# EAGLE board main (EAGLE 9.2.2)
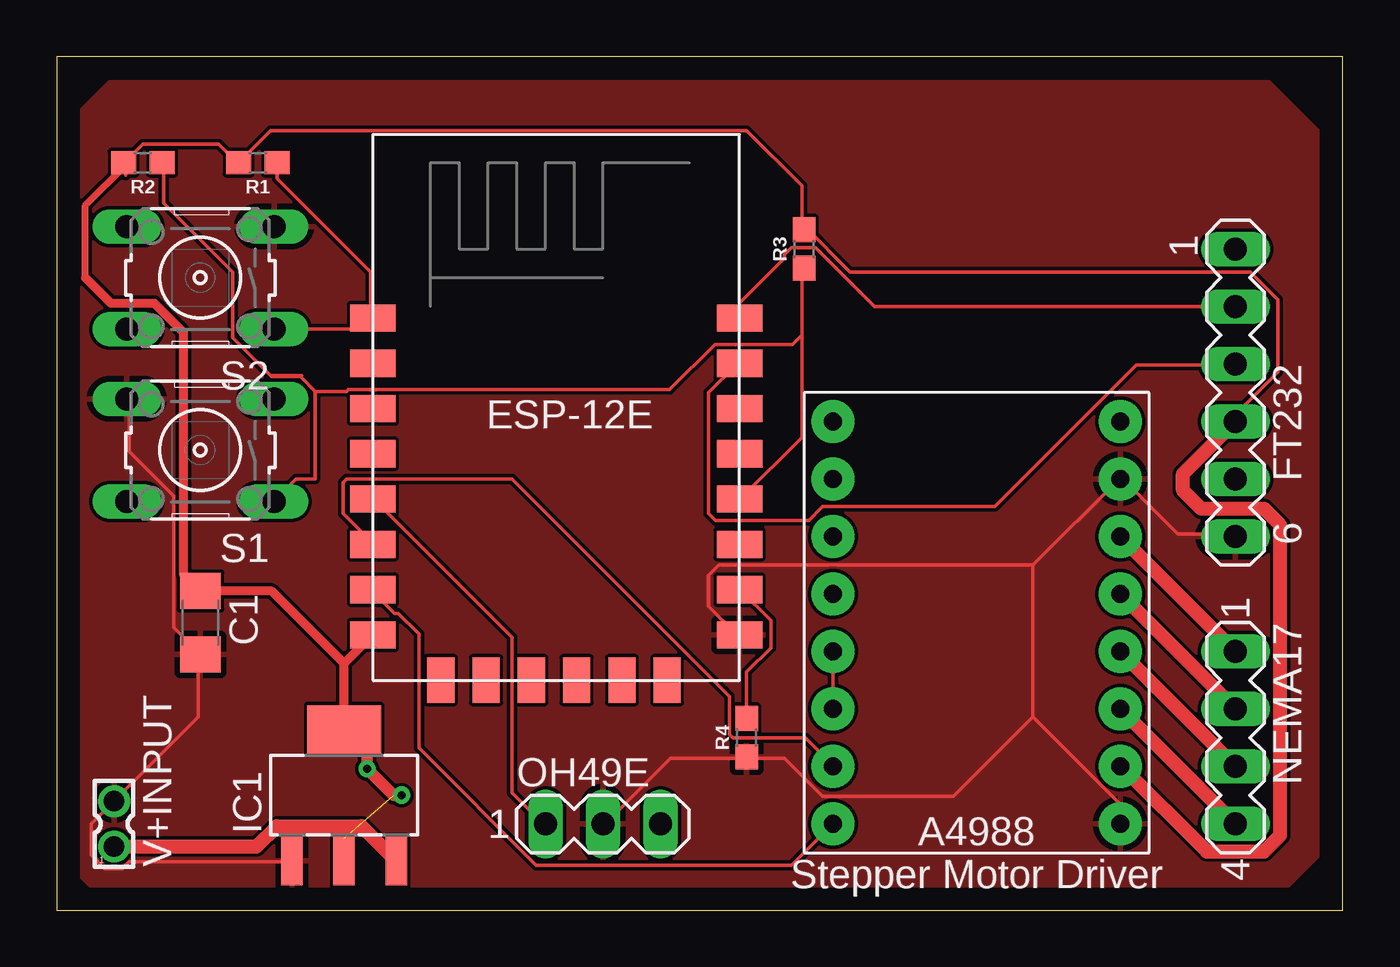
[diagram p0: board, top side]
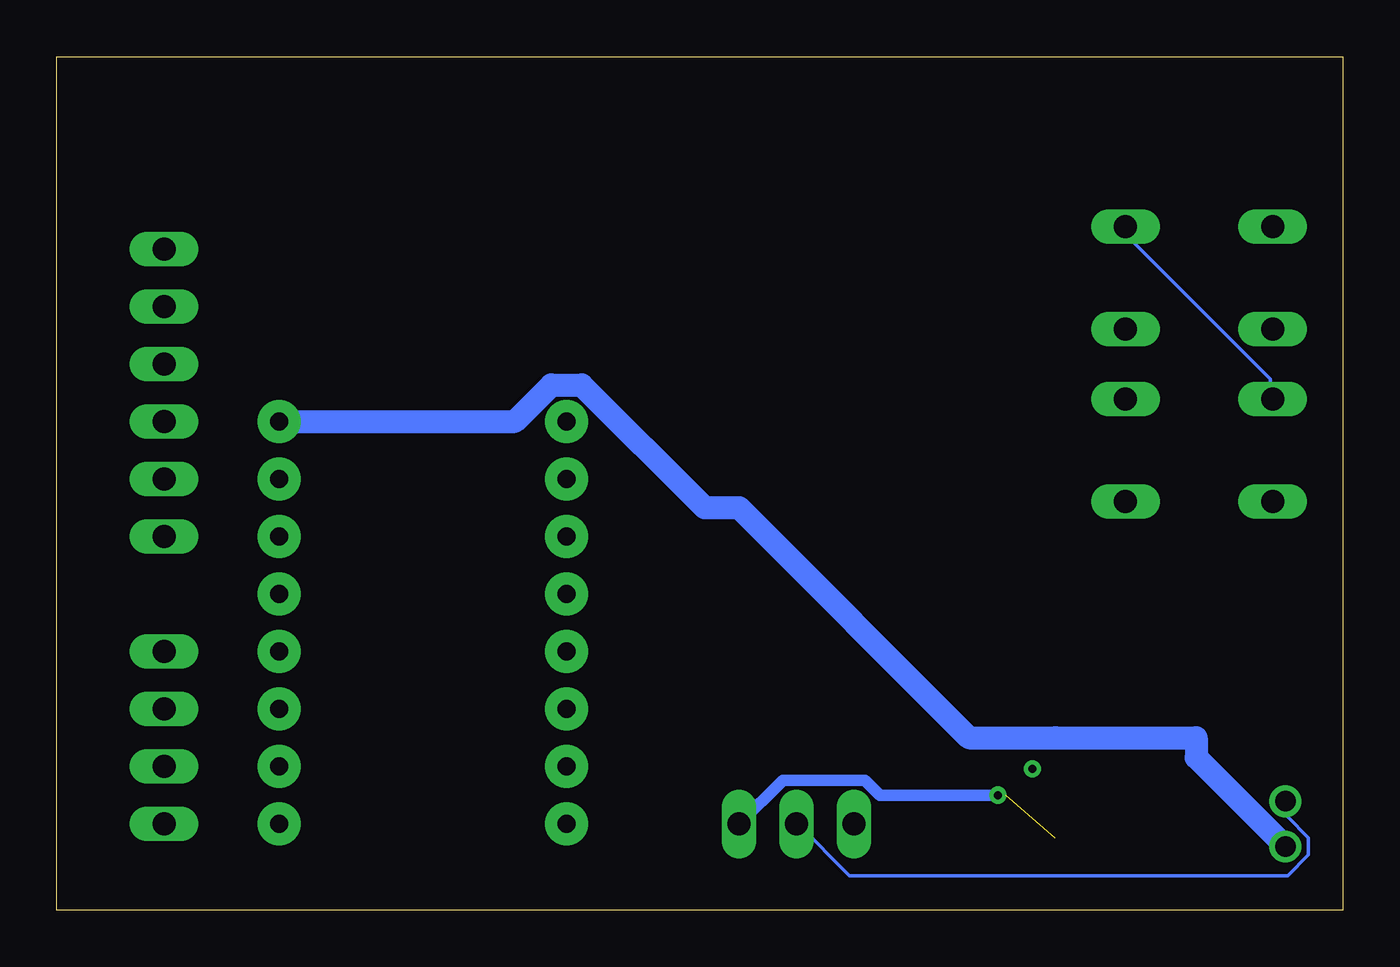
[diagram p1: board, bottom side, seen from below]

Size 56.82 x 37.71 mm. Coordinates in mm from the lower left corner, seen from the top.
Outline: 0,0 56.82,0 56.82,37.71 0,37.71 0,0
Copper layers (1*16): Top 0.035mm / dielectric 1.5mm / Bottom 0.035mm
Design rules "default": minimum track width 6mil, minimum drill 0.35mm, track to track 6mil, track to pad 6mil, pad to pad 6mil, via to via 6mil, smd to smd 6mil, copper to edge 40mil, drill to drill 6mil, minimum pad ring 10mil, minimum via ring 8mil, stop-mask expansion 4mil, vias tented up to drill 0mil, thermal gap 10mil

## Footprints (pad centres in the part's own frame; a part is rotated, then mirrored left to right if it is on the bottom)
C1206 = smd 1.6 x 1.8: 1 -1.4,0; 2 1.4,0
MA06-1 = drill 1.016 long: 1 -6.35,0; 2 -3.81,0; 3 -1.27,0; 4 1.27,0; 5 3.81,0; 6 6.35,0
SOT223 = smd 0.95 x 2.15: 1 -2.3,-2.9; 2 0,-2.9; 3 2.3,-2.9 | smd 3.25 x 2.15: 4 0,2.9
MA04-1 = drill 1.016 long: 1 -3.81,0; 2 -1.27,0; 3 1.27,0; 4 3.81,0
MA03-1 = drill 1.016 long: 1 -2.54,0; 2 0,0; 3 2.54,0
0603 = smd 1.1 x 1: 1 -0.85,0; 2 0.85,0
B3F-10XX = drill 1.016 long: 1 -3.251,2.261; 2 3.251,2.261; 3 -3.251,-2.261; 4 3.251,-2.261
ESP8266-ESP12E = smd 2 x 1.2: 1 -7.62,5.84; 2 -7.62,3.84; 3 -7.62,1.84; 4 -7.62,-0.16; 5 -7.62,-2.16; 6 -7.62,-4.16; 7 -7.62,-6.16; 8 -7.62,-8.16; 9 8.58,-8.16; 10 8.58,-6.16; 11 8.58,-4.16; 12 8.58,-2.16; 13 8.58,-0.16; 14 8.58,1.84; 15 8.58,3.84; 16 8.58,5.84 | smd 1.2 x 2: 17 -4.62,-10.16; 18 -2.62,-10.16; 19 -0.62,-10.16; 20 1.38,-10.16; 21 3.38,-10.16; 22 5.38,-10.16
A4988_STEP = drill 0.8 pad 1.905: 1A 6.35,-1.27; 1B 6.35,-3.81; 2A 6.35,1.27; 2B 6.35,3.81; /EN -6.35,8.89; /RST -6.35,-1.27; /SLP -6.35,-3.81; DIR -6.35,-8.89; GND 6.35,6.35; GND2 6.35,-8.89; MS1 -6.35,6.35; MS2 -6.35,3.81; MS3 -6.35,1.27; STEP -6.35,-6.35; VDD 6.35,-6.35; VMOT 6.35,8.89
332-02 = drill 0.9 pad 1.27: 1 0,-1; 2 0,1

## Placement (x,y rotation side)
C1  10uF  [C1206]  6.35,12.7 270 top
FT232  [MA06-1]  52.07,22.86 270 top
IC1  LM1117MP-3.3  [SOT223]  12.7,5.08 0 top
NEMA17  [MA04-1]  52.07,7.62 270 top
OH49E  [MA03-1]  24.13,3.81 0 top
R1  10k  [0603]  8.89,33.02 180 top
R2  10k  [0603]  3.81,33.02 180 top
R3  10k  [0603]  33.02,29.21 90 top
R4  10k  [0603]  30.48,7.62 90 top
S1  [B3F-10XX]  6.35,20.32 180 top
S2  [B3F-10XX]  6.35,27.94 180 top
SJR1  [ESP8266-ESP12E]  21.59,20.32 0 top
U$1  A4988_STEP  [A4988_STEP]  40.64,12.7 0 top
V+INPUT  332-02  [332-02]  2.54,3.81 0 top

## Library data of the parts
C1 = eagle-ltspice; SPICEMODEL: NONE; SPICEPREFIX: C
FT232 NEMA17 OH49E = con-lstb; OC_FARNELL: unknown; OC_NEWARK: unknown
IC1 = lm1117_10; MF: Texas Instruments; MPN: LM1117MP-3.3; OC_FARNELL: 9778195; OC_NEWARK: 28X3416
R1-R4 = SparkFun-Resistors; PROD_ID: RES-00824
S1 S2 = switch-omron; MPN: B3F-1000; OC_FARNELL: 176432; OC_NEWARK: 36M3542
SJR1 = esp12e
U$1 = IC
V+INPUT = con-garry

## Nets
+3V: C1.1 FT232.4 IC1.2 IC1.4 OH49E.3 R1.2 R2.2 R3.2 SJR1.8 U$1.VDD
+12V: IC1.3 U$1.VMOT V+INPUT.1
GND: C1.2 FT232.6 IC1.1 OH49E.2 R4.1 S1.4 S2.3 SJR1.9 U$1.GND U$1.GND2 V+INPUT.2
GPIO0: R2.1 R3.1 S1.1 SJR1.12
GPIO12: SJR1.6 U$1.STEP
GPIO13: SJR1.7 U$1.DIR
GPIO14: OH49E.1 SJR1.5
N$1: R1.1 S2.1 SJR1.1
N$3: R4.2 SJR1.10
N$4: NEMA17.4 U$1.1B
N$5: NEMA17.3 U$1.1A
N$6: NEMA17.2 U$1.2A
N$7: NEMA17.1 U$1.2B
N$8: U$1./RST U$1./SLP
RX: FT232.3 SJR1.15
TX: FT232.2 SJR1.16

## Tracks (layer width: path | path; a pad name or v marks a point on that pad's centre or on a via)
+3V  (via drill 0.35)  (1 unrouted)
  Top 0.152: 12.7,3.18 IC1.2 12.8,2.13 | FT232.4 52.12,21.64 52.12,21.95 53.95,23.77 53.95,26.98 52.73,28.19 35.05,28.19 33.07,30.18 R3.2 32.92,30.18 32.92,32 30.48,34.44 9.45,34.44 8.08,33.07 R1.2 7.92,33.07 7.16,33.83 3.81,33.83 3.05,33.07 R2.2 3.05,32.92 3.05,32.46 | 6.25,14.17 C1.1 | 13.72,7.01 v13.72,6.25
  Top 0.305: 1.27,27.94 1.27,31.14 3.05,32.92
  Top 0.406: 12.7,10.89 SJR1.8 | IC1.4 12.7,10.89 | 12.7,10.89 9.49,14.1 C1.1 5.61,14.84 5.61,25.51 4.32,26.8 2.41,26.8 1.27,27.94
  Top 0.508: IC1.4 13.72,6.96 v13.72,6.25 14.88,5.08 v15.24,5.08
  Top 0.61: FT232.4 49.75,19.27 49.75,18.55 50.57,17.73 53.34,17.73 54.05,17.02 54.05,3.31 53.34,2.59 50.8,2.59 47.04,6.35 U$1.VDD
  Bottom 0.508: v15.24,5.08 20.45,5.08 21.11,5.74 24.74,5.74 OH49E.3
+12V
  Top 0.61: V+INPUT.1 8.83,2.81 9.74,3.71 13.47,3.71 IC1.3
  Bottom 0.152: 2.59,2.9 V+INPUT.1
  Bottom 1.016: U$1.VMOT 36.57,21.59 34.96,23.2 33.62,23.2 28.2,17.78 26.67,17.78 16.51,7.62 12.7,7.62 6.48,7.62 6.48,6.75 V+INPUT.1
GND
  Top 0.152: IC1.1 10.36,2.13 3.2,2.13 2.9,1.83 2.13,1.83 1.52,2.44 1.52,3.81 2.44,4.72 V+INPUT.2 2.59,4.88 6.25,8.53 6.25,11.28 C1.2 6.25,11.43 5.18,12.5 5.18,18.29 3.2,20.27 3.2,22.55 S1.4 | 30.48,6.71 27.13,6.71 24.23,3.81 OH49E.2 | 43.13,15.24 29.26,15.24 28.8,14.78 28.8,13.41 30.02,12.19 SJR1.9 | 43.13,15.24 46.94,19.05 U$1.GND 47.09,19.05 49.53,16.61 51.97,16.61 FT232.6 | 43.13,8.53 46.94,4.72 46.94,3.81 U$1.GND2 | 43.13,15.24 43.13,8.53 | 30.48,6.71 32.16,6.71 33.83,5.03 39.62,5.03 43.13,8.53 | 30.48,6.71 R4.1
  Bottom 0.152: S2.3 9.6,29.87 3.2,23.47 3.2,22.71 S1.4 | V+INPUT.2 2.44,4.72 2.44,4.12 1.52,3.2 1.52,2.44 2.44,1.52 21.79,1.52 24.08,3.81 OH49E.2
  pour Top: 0,2.54 0,34.29 2.54,36.83 53.34,36.83 55.88,34.29 55.88,2.54 53.34,0 2.54,0
GPIO0
  Top 0.152: 32.92,25.4 32.92,20.88 30.18,18.14 SJR1.12 | 32.92,25.4 32.92,28.35 R3.1 | 9.45,23.62 7.77,25.3 7.77,28.19 4.72,31.24 4.72,32.92 R2.1 | 10.82,23.62 9.45,23.62 | 9.45,23.62 9.5,23.57 10.77,23.57 11.43,22.91 | 11.43,22.91 11.43,19.05 10.59,19.05 S1.1 | 11.43,22.91 12.8,22.91 12.88,22.99 27.07,22.99 29.07,24.99 32.51,24.99 32.92,25.4
GPIO12
  Top 0.152: SJR1.6 13.87,16.31 12.65,17.53 12.65,18.9 12.8,19.05 20.12,19.05 29.72,9.45 29.72,7.77 29.87,7.62 33.07,7.62 34.29,6.4 U$1.STEP
GPIO13
  Top 0.152: U$1.DIR 32.46,1.98 21.18,1.98 16,7.16 16,12.19 15.09,13.11 14.94,13.11 14.02,14.02 SJR1.7
GPIO14
  Top 0.152: SJR1.5 14.02,18.14 20.12,12.04 20.12,5.18 21.49,3.81 OH49E.1
N$1
  Top 0.152: S2.1 13.49,25.68 SJR1.1 13.87,26.21 13.87,28.19 9.75,32.31 9.75,32.92 R1.1
N$3
  Top 0.152: R4.2 30.48,10.52 31.55,11.58 31.55,12.8 30.18,14.17 SJR1.10
N$4
  Top 0.152: 51.97,3.81 NEMA17.4 | 46.94,8.84 U$1.1B
  Top 0.61: U$1.1B NEMA17.4
N$5
  Top 0.152: 51.97,6.4 NEMA17.3 | 46.94,11.43 U$1.1A
  Top 0.61: U$1.1A NEMA17.3
N$6
  Top 0.61: U$1.2A NEMA17.2
N$7
  Top 0.152: 51.97,11.43 NEMA17.1 | 46.94,16.46 U$1.2B
  Top 0.61: U$1.2B NEMA17.1
N$8
  Top 0.152: U$1./RST U$1./SLP
RX
  Top 0.152: SJR1.15 30.02,24.08 28.8,22.86 28.8,17.53 29.11,17.22 33.22,17.22 33.83,17.83 41.45,17.83 47.7,24.08 51.97,24.08 FT232.3
TX
  Top 0.152: FT232.2 36.12,26.67 33.53,29.26 32.46,29.26 32.16,28.96 32.16,28.8 30.18,26.82 30.18,26.21 SJR1.16